# EAGLE board alarm (EAGLE 6.2)
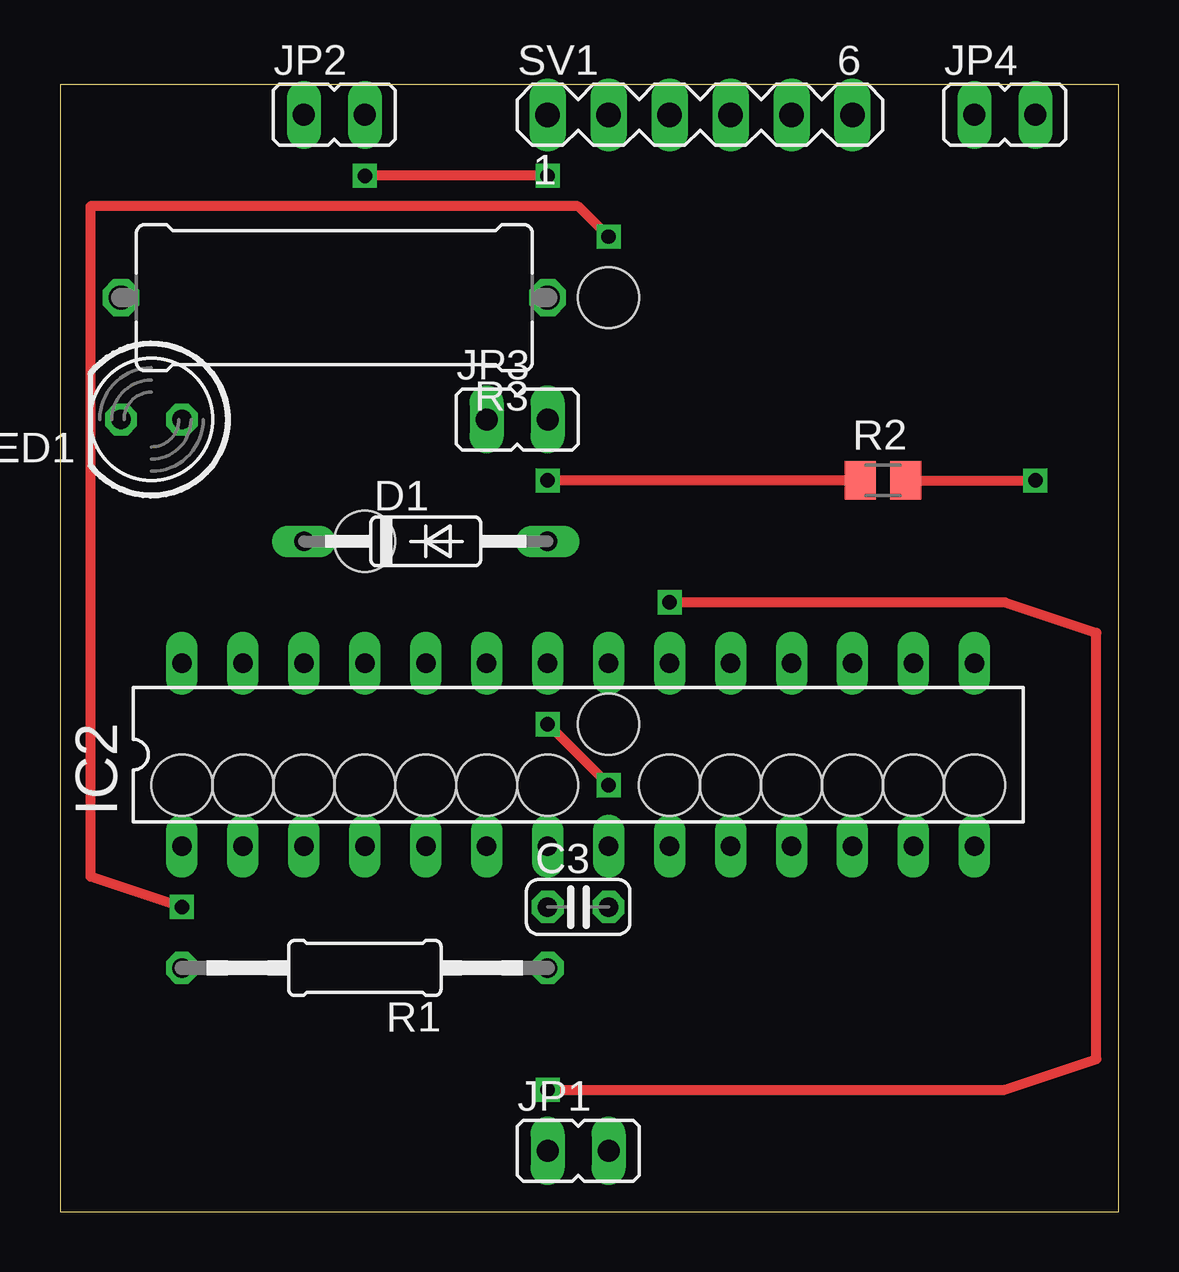
[diagram p0: board, top side]
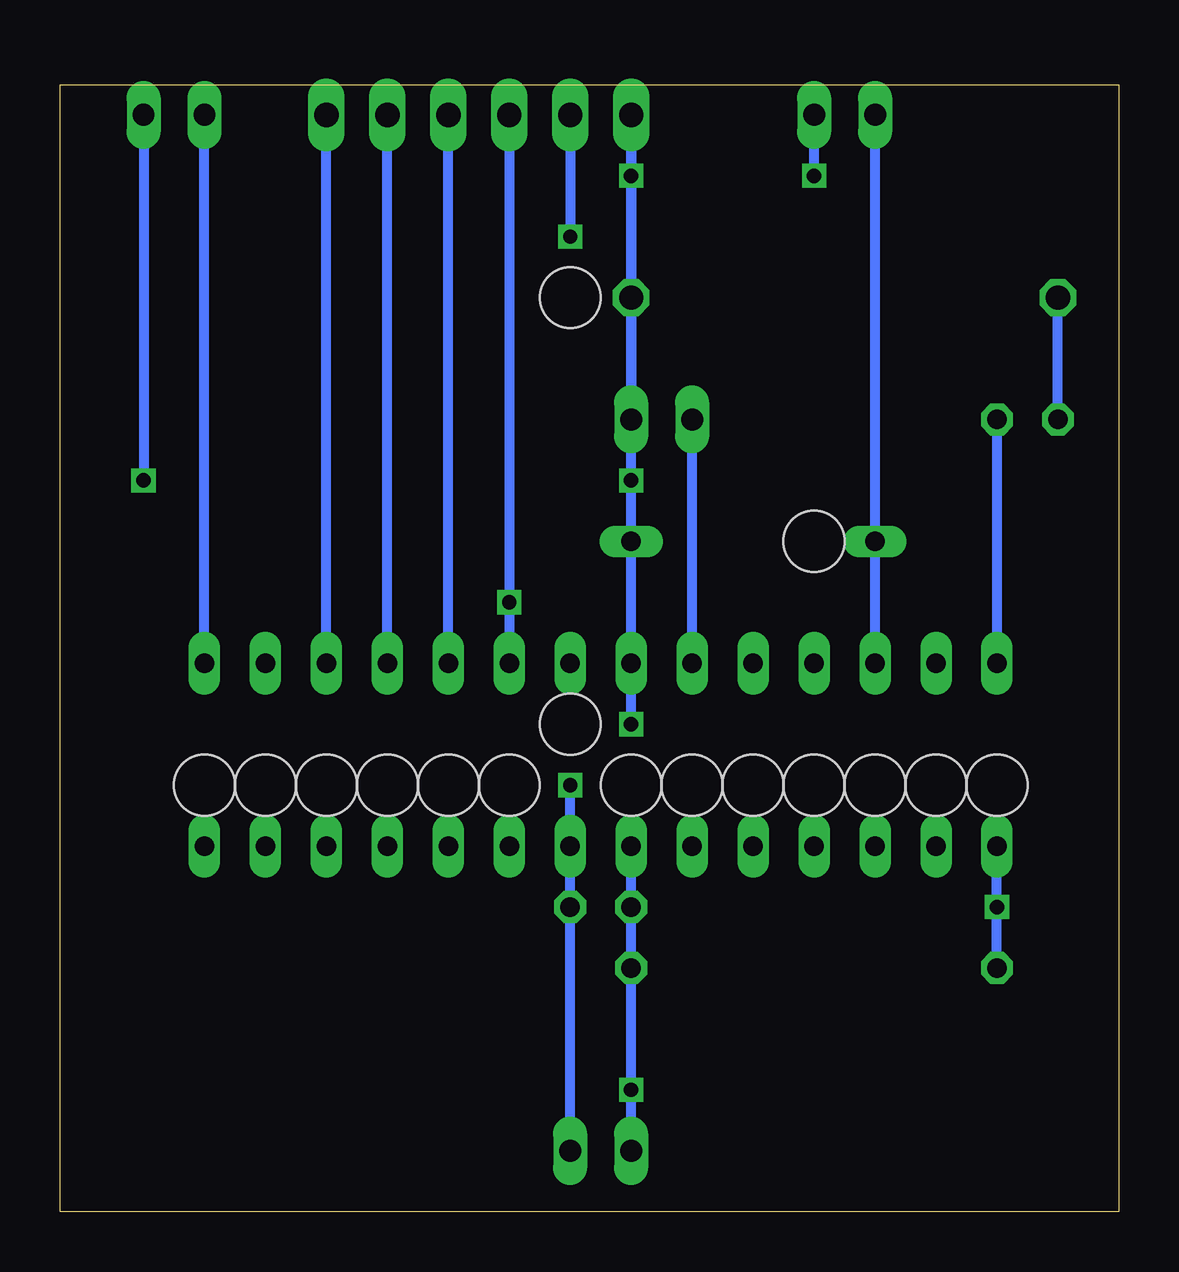
[diagram p1: board, bottom side, seen from below]

Size 44.12 x 46.98 mm. Coordinates in mm from the lower left corner, seen from the top.
Outline: 0,0 44.12,0 44.12,46.98 0,46.98 0,0
Copper layers (1*16): Top 0.035mm / dielectric 1.5mm / Bottom 0.035mm
Design rules: minimum track width 10mil, minimum drill 24mil, track to track 8mil, track to pad 8mil, pad to pad 8mil, via to via 8mil, smd to smd 8mil, copper to edge 40mil, drill to drill 8mil, minimum pad ring 10mil, minimum via ring 8mil, stop-mask expansion 4mil, vias tented up to drill 0mil, thermal gap 10mil
Holes 2.54 mm at 38.1,17.78 35.56,17.78 33.02,17.78 30.48,17.78 27.94,17.78 25.4,17.78 17.78,17.78 15.24,17.78 22.86,20.32 12.7,17.78 7.62,17.78 10.16,17.78 5.08,17.78 20.32,17.78 22.86,38.1 12.7,27.94

## Footprints (pad centres in the part's own frame; a part is rotated, then mirrored left to right if it is on the bottom)
C025-024X044 = drill 0.813 octagon: 1 -1.27,0; 2 1.27,0
DO35-10 = drill 0.813 long: A 5.08,0; C -5.08,0
DIL28-3 = drill 0.813 long: 1 -16.51,-3.81; 2 -13.97,-3.81; 3 -11.43,-3.81; 4 -8.89,-3.81; 5 -6.35,-3.81; 6 -3.81,-3.81; 7 -1.27,-3.81; 8 1.27,-3.81; 9 3.81,-3.81; 10 6.35,-3.81; 11 8.89,-3.81; 12 11.43,-3.81; 13 13.97,-3.81; 14 16.51,-3.81; 15 16.51,3.81; 16 13.97,3.81; 17 11.43,3.81; 18 8.89,3.81; 19 6.35,3.81; 20 3.81,3.81; 21 1.27,3.81; 22 -1.27,3.81; 23 -3.81,3.81; 24 -6.35,3.81; 25 -8.89,3.81; 26 -11.43,3.81; 27 -13.97,3.81; 28 -16.51,3.81
JP1 = drill 0.914 long: 1 0,-1.27; 2 0,1.27
LED5MM = drill 0.813 octagon: A -1.27,0; K 1.27,0
0207/15 = drill 0.813 octagon: 1 -7.62,0; 2 7.62,0
M0805 = smd 1.3 x 1.6: 1 -0.95,0; 2 0.95,0
0617/17 = drill 1.016 octagon: 1 -8.89,0; 2 8.89,0
MA06-1 = drill 1.016 long: 1 -6.35,0; 2 -3.81,0; 3 -1.27,0; 4 1.27,0; 5 3.81,0; 6 6.35,0

## Placement (x,y rotation side)
C3  100n  [C025-024X044]  21.59,12.7 0 top
D1  1N4148DO35-10  [DO35-10]  15.24,27.94 0 top
IC2  MEGA8-P  [DIL28-3]  21.59,19.05 0 top
JP1  POWER  [JP1]  21.59,2.54 270 top
JP2  IN  [JP1]  11.43,45.72 270 top
JP3  DEBUG  [JP1]  19.05,33.02 270 top
JP4  SPEAKER  [JP1]  39.37,45.72 270 top
LED1  DEBUG  [LED5MM]  3.81,33.02 180 top
R1  10k  [0207/15]  12.7,10.16 180 top
R2  100  [M0805]  34.29,30.48 0 top
R3  1k  [0617/17]  11.43,38.1 180 top
SV1  [MA06-1]  26.67,45.72 0 top

## Library data of the parts
C3 R1-R3 = rcl
D1 = diode
IC2 = atmel
JP1-JP4 = jumper
LED1 = led
SV1 = con-lstb; OC_FARNELL: unknown; OC_NEWARK: unknown

## Nets
GND: C3.2 D1.A IC2.8 IC2.22 JP1.2 JP2.2 JP3.2 R2.1 R3.1 SV1.1
N$1: JP4.2 R2.2
N$2: D1.C IC2.26 JP2.1
N$3: IC2.15 JP4.1
N$4: IC2.23 JP3.1
N$5: IC2.19 SV1.4
N$6: IC2.18 SV1.5
N$7: IC2.17 SV1.6
N$8: LED1.K R3.2
N$9: IC2.28 LED1.A
N$17: IC2.1 R1.2 SV1.2
VCC: C3.1 IC2.7 IC2.20 JP1.1 R1.1 SV1.3

## Tracks (layer width: path | path; a pad name or v marks a point on that pad's centre or on a via)
GND  (via drill 0.6)
  Top 0.406: v22.86,17.78 v20.32,20.32 | v20.32,43.18 v12.7,43.18 | R2.1 v20.32,30.48
  Bottom 0.406: v22.86,17.78 IC2.8 C3.2 JP1.2 | v20.32,20.32 IC2.22 D1.A v20.32,30.48 v20.32,43.18 SV1.1 | v12.7,43.18 JP2.2 | SV1.1 JP3.2 | SV1.1 R3.1
N$1  (via drill 0.6)
  Top 0.406: R2.2 v40.64,30.48
  Bottom 0.406: JP4.2 v40.64,30.48
N$2
  Bottom 0.406: IC2.26 D1.C JP2.1
N$3
  Bottom 0.406: IC2.15 JP4.1
N$4
  Bottom 0.406: IC2.23 JP3.1
N$5
  Bottom 0.406: IC2.19 SV1.4
N$6
  Bottom 0.406: IC2.18 SV1.5
N$7
  Bottom 0.406: IC2.17 SV1.6
N$8
  Bottom 0.406: LED1.K R3.2
N$9
  Bottom 0.406: LED1.A IC2.28
N$17  (via drill 0.6)
  Top 0.406: v22.86,40.64 21.59,41.91 1.27,41.91 1.27,13.97 v5.08,12.7
  Bottom 0.406: R1.2 v5.08,12.7 IC2.1 | SV1.2 v22.86,40.64
VCC  (via drill 0.6)
  Top 0.406: v20.32,5.08 39.37,5.08 43.18,6.35 43.18,24.13 39.37,25.4 v25.4,25.4
  Bottom 0.406: IC2.7 C3.1 R1.1 v20.32,5.08 JP1.1 | SV1.3 v25.4,25.4 IC2.20